# Altium PCB PCB1.PcbDoc
Units mil, origin at the board's own origin, x right, y up, seen from the top; angles counter-clockwise.
Board outline 1650 x 2726.39 mil, 2 copper layers (Top Layer, Bottom Layer); 47 components, 44 nets, 188 pads, 33 vias.
Unrouted connection lines stored in the file: 1.
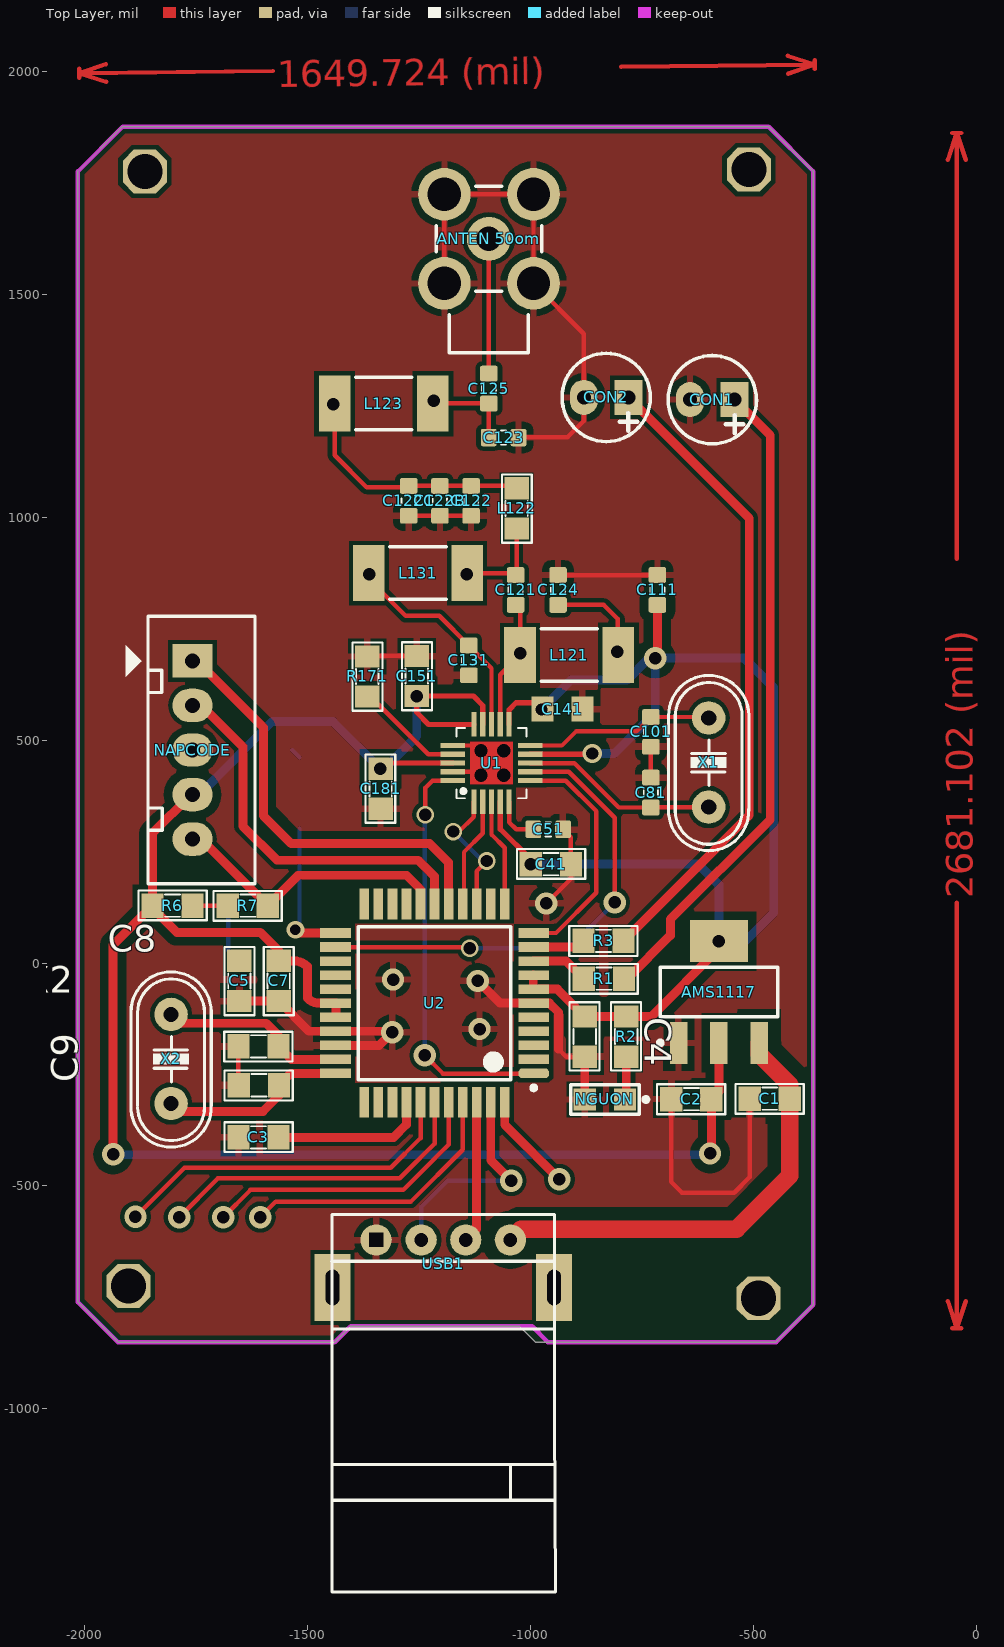
[diagram p0: Top Layer view]
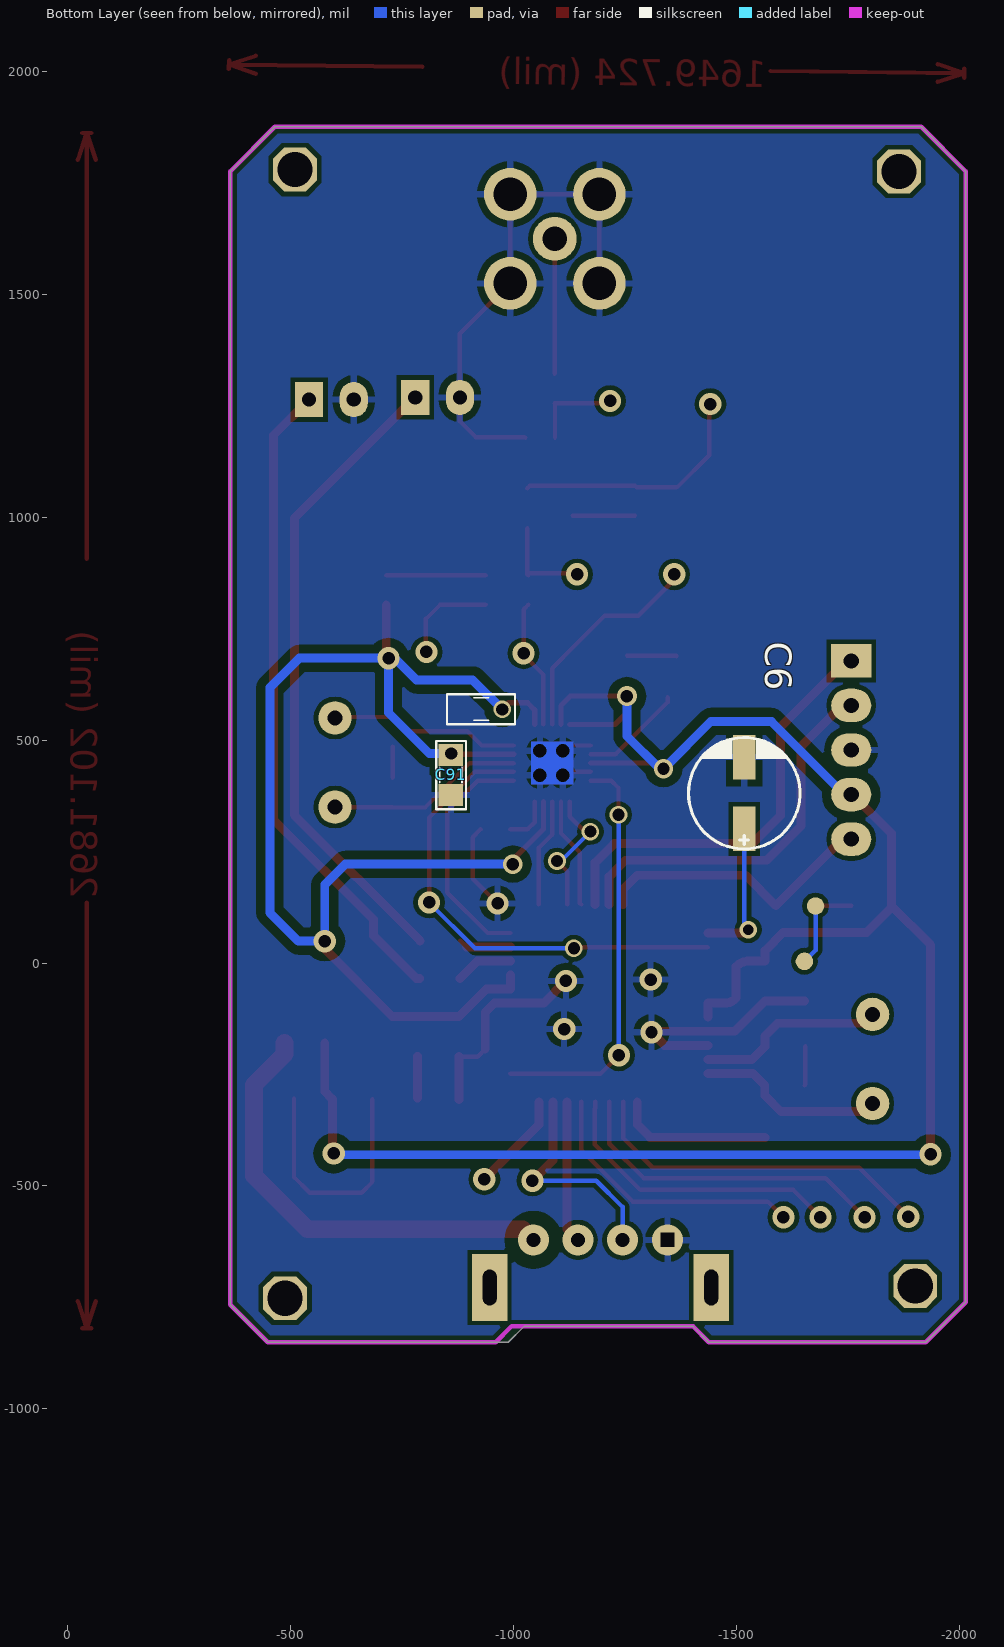
[diagram p1: Bottom Layer view, seen from below]
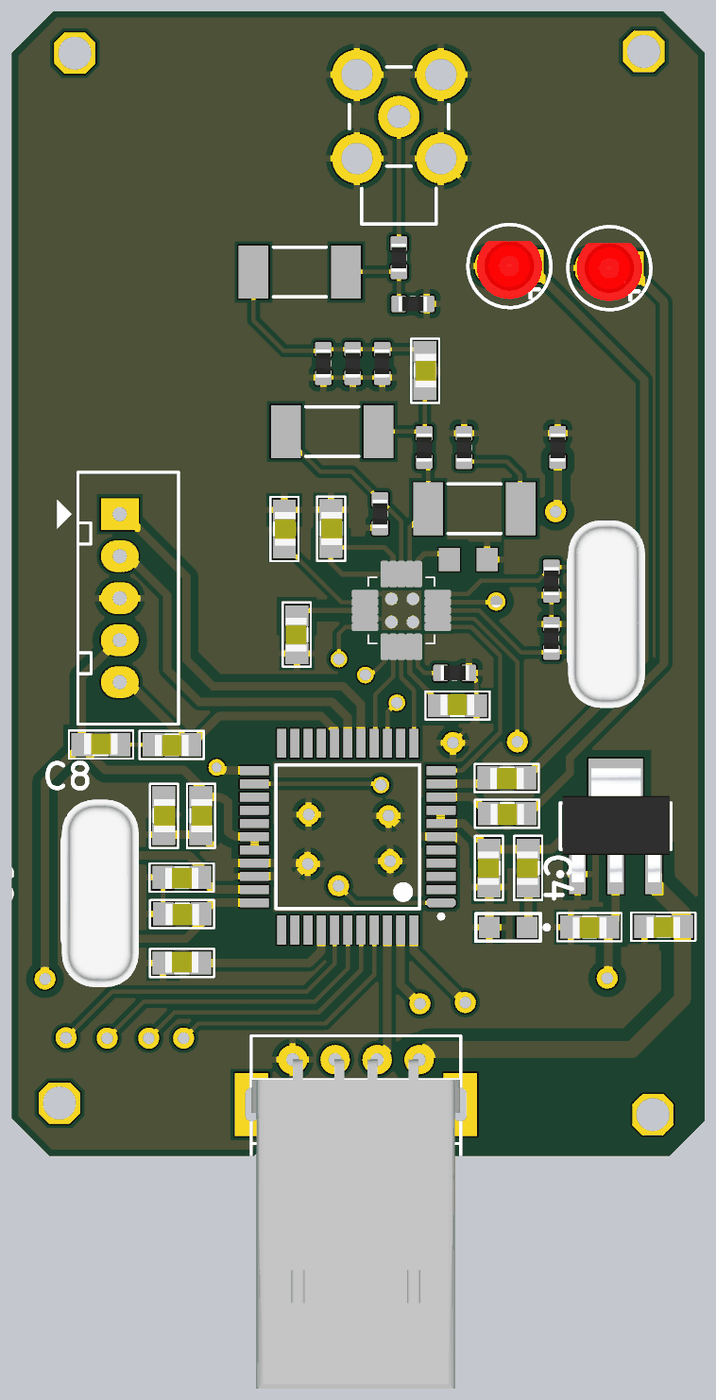
[diagram p2: 3D render of the assembled board from above, using the file's embedded part models]

## Layer stack, top to bottom
Top Solder: solder mask 0.4, Solder Resist, Dk 3.5
Top Layer: signal copper 1.4
Dielectric1: dielectric 12.6, FR-4, Dk 4.8
Bottom Layer: signal copper 1.4
Bottom Solder: solder mask 0.4, Solder Resist, Dk 3.5

## Board outline
-2015,-760.59 -2015,1776 -1915,1876 -465,1876 -365,1776 -365,-766.57 -448.82,-850.39 -988.61,-850.39 -1024.04,-814.96 -1403.17,-814.96 -1438.61,-850.39 -1925.2,-850.39

## Design rules (kind name [scope] priority, off if disabled: settings)
Clearance 3.3 [InNet('+3.3V')] p1: gap=20
Clearance 5 [InNet('+5V')] p2: gap=30
Clearance [All] p3: gap=10
PolygonConnect [All] p1: connectstyle=Relief reliefconductorwidth=15 reliefentries=4 polygonreliefangle="90 Angle" airgapwidth=15
RoutingVias [All] p1: holewidth=28 width=50 viastyle="Through Hole" minholewidth=28 minwidth=50 maxholewidth=28 maxwidth=50
SolderMaskExpansion [All] p1: expansion=4
UnpouredPolygon [All] p1: allowunpoured=FALSE
Width 5V [InNet('+5V')] p1: maxlimit=40 minlimit=40 preferedwidth=40
Width 3.3V [InNet('+3.3V')] p2: maxlimit=25 minlimit=12 preferedwidth=20
Width [All] p3: maxlimit=20 minlimit=20 preferedwidth=20
29 further rules are at their usual default settings.

## Components (designator, comment, footprint, x,y, rotation, side; value= is the part's Value field where it differs from the comment)
AMS1117 "LM317" SOT223-4N -577,-65 r90 top
"ANTEN 50om" "Header 2" MCX5.08-H5 -1093,1369 r90 top
C1 "104" SM-0805#1 -463,-304 r0 top
C2 "104" SM-0805#1 -639,-305 r0 top
C3 "103" SM-0805#1 -1610,-391 r180 top
C4 "103" SM-0805#1 -878,-165 r270 top
C5 "103" SM-0805#1 -1653,-40 r90 top
C6 "100uF/35V" CP1/2.5_SM -1518,331 r90 bottom
C7 "103" SM-0805#1 -1565,-40 r90 top
C8 "33pF" SM-0805#1 -1609,-274 r0 top
C9 "33pF" SM-0805#1 -1610,-187 r0 top
C41 "104" SM-0805#1 -954,222 r180 top
C51 "104" 0603ESDA -960,300 r180 top
C81 "27pF" 0603ESDA -729.68,382.59 r270 top
C91 "103" SM-0805#1 -860,422 r90 bottom
C101 "27pF" 0603ESDA -729.68,518.59 r90 top
C111 "220pF" 0603ESDA -715,837 r270 top
C121 "6.8pF" 0603ESDA -1033,837 r270 top
C122 "12pF" 0603ESDA -1133,1037 r270 top
C122B "12pF" 0603ESDA -1203,1037 r270 top
C122C "12pF" 0603ESDA -1273,1037 r270 top
C123 "6.8pF" 0603ESDA -1060,1179 r0 top
C124 "220pF" 0603ESDA -938,837 r270 top
C125 "220pF" 0603ESDA -1093,1289 r90 top
C131 "27" 0603ESDA -1138,679 r270 top
C141 "103" SM-0805#2 -928,570 r180 bottom
C151 "220pF" SM-0805#1 -1255,644 r90 top
C181 "27pF" SM-0805#1 -1336,391 r270 top
CON1 "LED" LED3mm -592,1264 r180 top
CON2 "LED" LED3mm -830,1269 r180 top
L121 "27nH" SM-2512 -913,691 r180 top
L122 "22nH" SM-0805#1 -1031,1020 r90 top
L123 "27nH" SM-2512 -1329,1255 r0 top
L131 "27nH" SM-2512 -1252,875 r0 top
NAPCODE "JP5" CON5 -1758,678 r270 top
NGUON "LED" LED0805 -833,-306 r180 top
R1 "220" SM-0805#1 -835,-35 r0 top
R2 "220" SM-0805#1 -785,-165 r270 top
R3 "220" SM-0805#1 -836,50 r0 top
R6 "1k" SM-0805#1 -1803,129 r180 top
R7 "1k" SM-0805#1 -1634,129 r0 top
R171 "56K" SM-0805#1 -1366,643 r90 top
U1 "CC1101" QFN-20Pin -1166,370 r90 top
U2 "PIC18F45J50-I/ML" PIC18F45J50SMD -1215,-90 r180 top
USB1 "USB-S" USB-A -1045,-621 r180 top
X1 "26Mhz" XT2 -600,450 r90 top
X2 "20Mhz" XT2 -1806,-215 r90 top

## Footprints (in the part's own frame and the unit in brackets; to place one, negate y for a bottom-side part, rotate by r counter-clockwise, add the part's x,y. Pads: shape width x height; smd on the part's side, far side on the other; paste and mask are expansions set on the pad)
0603ESDA [mm] "Chip ESD suppressor, Body 1.6x0.8mm, 0603, IPC Medium Density"
  round 0.254 on Mech15: 0(0,0)
  rrect25% 0.9x1 smd: 1(-0.85,0) 2(0.85,0)
  Top Layer pour cut-out: -0.65,0.5 -0.45,0.7 0.45,0.7 0.65,0.5 0.65,-0.5 0.45,-0.7 -0.45,-0.7 -0.65,-0.5
  silkscreen extent -0.15,-0.41 0.15,0.41, body extent -0.85,-0.45 0.85,0.45, height 0.79
CON5 [mil] "CON5"
  rect 75x90 hole 34: 1(0,0)
  oval 75x90 hole 34: 2(100,0) 3(200,0) 4(300,0) 5(400,0)
  silkscreen extent -100,-150 500,140
CP1/2.5_SM [mil] "Tu hoa SMD 33 >100 uF,50V, 220uF/16V,25V"
  rect 100x50 smd: 1(-30,0) 2(131,0)
  silkscreen extent -75,-125 175,125
LED3mm [mm]
  rect 1.6x2 hole 0.8: 1(-1.27,0)
  oval 1.6x2 hole 0.8: 2(1.27,0)
  silkscreen extent -2.52,-2.51 2.51,2.52, body extent -1.99,-1.5 1.99,1.99, height 5.38
LED0805 [mil] "Chip Resistor; Body 2.0 x 1.3 mm (LxW typ)"
  rect 50x50 smd: 1(-45,0) 2(45,0)
  silkscreen extent -97,-33 77,33, body extent -60,-25 60,25, height 47
MCX5.08-H5 [mm] "Chan anten"
  round 2.5 hole 1.4: 1(6.5,0)
  round 3 hole 1.9: 2(3.96,-2.54) 2(3.96,2.54) 2(9.04,-2.54) 2(9.04,2.54)
  silkscreen extent 0,-3 9.5,3
PIC18F45J50SMD [mm] "PIC18F45J50SMD"
  oct 1.75x0.55 smd: 1(-5.65,4)
  rect 1.75x0.55 smd: 2(-5.65,3.2) 3(-5.65,2.4) 4(-5.65,1.6) 5(-5.65,0.8) 6(-5.65,0) 7(-5.65,-0.8) 8(-5.65,-1.6) 9(-5.65,-2.4) 10(-5.65,-3.2) 11(-5.65,-4) 23(5.65,-4) 24(5.65,-3.2) 25(5.65,-2.4) 26(5.65,-1.6) 27(5.65,-0.8) 28(5.65,0) 29(5.65,0.8) 30(5.65,1.6) 31(5.65,2.4) 32(5.65,3.2) 33(5.65,4)
  rect 0.55x1.75 smd: 12(-4,-5.65) 13(-3.2,-5.65) 14(-2.4,-5.65) 15(-1.6,-5.65) 16(-0.8,-5.65) 17(0,-5.65) 18(0.8,-5.65) 19(1.6,-5.65) 20(2.4,-5.65) 21(3.2,-5.65) 22(4,-5.65) 34(4,5.65) 35(3.2,5.65) 36(2.4,5.65) 37(1.6,5.65) 38(0.8,5.65) 39(0,5.65) 40(-0.8,5.65) 41(-1.6,5.65) 42(-2.4,5.65) 43(-3.2,5.65) 44(-4,5.65)
  silkscreen extent -5.77,-4.35 4.35,4.95, body extent -5,-5 5,5, height 1.2
QFN-20Pin [mm] "QFN 20pin 4x4mm"
  rect 1.4x0.3 smd paste+0.1 mask+0.1: 1(-0.2,-1) 2(-0.2,-1.5) 3(-0.2,-2) 4(-0.2,-2.5) 5(-0.2,-3) 11(4.2,-3) 12(4.2,-2.5) 13(4.2,-2) 14(4.2,-1.5) 15(4.2,-1)
  rect 0.3x1.4 smd paste+0.1 mask+0.1: 6(1,-4.2) 7(1.5,-4.2) 8(2,-4.2) 9(2.5,-4.2) 10(3,-4.2) 16(3,0.2) 17(2.5,0.2) 18(2,0.2) 19(1.5,0.2) 20(1,0.2)
  round 0 hole 0.762: 21(1.3,-1.4) 21(1.3,-2.7) 21(2.7,-2.7) 21(2.7,-1.4)
  Top Layer region: 0.8,-0.8 3.2,-0.8 3.2,-3.2 0.8,-3.2
  Bottom Layer region: 0.8,-0.8 3.2,-0.8 3.2,-3.2 0.8,-3.2
  Top Overlay keep-out circle w0.254: c0.4,-0.4 r0.1
  silkscreen extent 0,-4 4,0
SM-0805#1 [mil] "Compoment SMD 80x50mil"
  rect 50x55 smd: 1(-45,0) 2(45,0)
  silkscreen extent -77,-34 76,33, body extent -40,-27 40,23, height 24
SM-0805#2 [mil] "Compoment SMD 80x50mil"
  rect 50x55 smd far side: 1(-45,0) 2(45,0)
  silkscreen extent -77,-34 76,33, body extent -40,-27 40,23, height 24
SM-2512 [mm] "Chip Resistor; Body 6.3 x 3.2 mm (LxW typ) - C"
  rect 1.8x3.2 smd: 1(-2.8,0) 2(2.8,0)
  silkscreen extent -1.6,-1.5 1.6,1.5
SOT223-4N [mm] "SOT223, 4-Leads, Body 6.5x3.5mm, Pitch 2.3mm, Lead Span 7mm, IPC Medium Density"
  rect 2.4x1 smd: 1(-2.9,2.3) 2(-2.9,0) 3(-2.9,-2.3)
  rect 2.4x3.3 smd: 4(2.9,0)
  silkscreen extent -3.02,-3.35 1.4,3.47, body extent -3.39,-3.27 3.5,3.23, height 1.72
USB-A [mil]
  round 70 hole 31: 1(0,0) 2(100,0) 3(200,0)
  round 70 hole 31 square: 4(301,0)
  rect 80x150 hole 31 slot 80 at 90 deg: 5(-98,107) 6(399,107)
  silkscreen extent -101,-57 401,790, body extent -97,0 399,784, height 177
XT2 [mil] "Footpin for Crystal 2 pin"
  round 75 hole 34: 1(-100,0) 2(100,0)
  silkscreen extent -198,-90 195,90, body extent -233,-93 213,90, height 138

## Part data
AMS1117: "Adj Voltage +1.2 -> +37V"
"ANTEN 50om": library part Hed2, "Header 2 (Green)"
C1 C2: library part Cap, "Capacitor"
C3 C4 C5 C7 C41 C51 C81 C91 C101 C111 C121 C122 C122B C122C C123 C124 C125 C131 C141 C151 C181: library part CM, "Cap SMD"
C6: library part CP3, "Cap 100uF/35V - 470uF/16V"
C8 C9: library part CN0, "Cremic For Xtal 1pF => 100pF"
CON1 CON2 NGUON: "LED Single colour Green and Red"
L121 L122 L123 L131: library part L1, "Inductor"
NAPCODE: library part Con5, "Connector 5"
R1 R2 R3 R6 R7: library part R, "Resistor 1/4W"
R171: library part RM, "Resistor SMD"
U1: "Transceiver 315Mhz"
U2: "Low Power, High Performance USB Microcontroller with nanoWatt XLP Technology, 44-pin QFN, Industrial Temperature"
USB1: library part USB_S, "USB connector"
X1 X2: library part XT2, "Crystal For all Crystal 2pin."

## Free pads (board coordinates)
  oct 98.43x98.43 hole 78.74: 0(-510,1780) 1(-1865,1776) 2(-488.19,-751.97) 3(-1901.57,-724.41)
  round 39.37 all layers, no hole: 2(-1678,128) 3(-1653,4)

## Via types
v1: diameter 50, hole 28, Top Layer to Bottom Layer, 23 vias
v2: diameter 39.37, hole 27.56, Top Layer to Bottom Layer, 5 vias
v3: diameter 43.31, hole 27.56, Top Layer to Bottom Layer, 3 vias
v4: diameter 45, hole 28, Top Layer to Bottom Layer, 1 vias
v5: diameter 39.37, hole 23.62, Top Layer to Bottom Layer, 1 vias

## Nets (pads, with @x,y where several pads share a name; then routed paths per layer and width w, separated by ;. In a path a pad name is that pad's centre, name@x,y a point inside that pad or via, vN(x,y) a via of type N, cw(c..) or ccw(c..) an arc to the next point about the centre after c; other vN are vias at no path point)
+3.3V: AMS1117.2 AMS1117.4 C2.2 C4.1 C7.2 C41.2 C91.2 C111.2 C141.2 C151.1 C181.1 NAPCODE.4 R2.1 R6.2 U1.4 U1.9 U1.11 U1.14 U1.15 U1.18 U2.7 U2.8 U2.28 U2.29 | length 7583.4
  Top Layer w12: v3(-1337,436) C181.1 -1323.26,448.74 U1.18 ; U1.15 -1228.27,535.35 -1255,562.09 v4(-1255,599) -1128,599 -1106.94,577.94 U1.14 ; U1.4 -1067.57,300.57 -999,232 v3(-999,222) ; U1.11 -1047.89,568.11 -1032,584 -990,584 v2(-975,569) ; U1.9 -862.57,468.43 v3(-861,470)
  Top Layer w20: v1(-1936,-429) -1936,41 R6.2 ; NAPCODE.4@-1743,378 NAPCODE.4 -1760.96,378 -1848,290.96 R6.2 ; U2.29@-1436.46,-121.5 -1436.46,-90 -1472.82,-90 cw(c-1472.82,-51.56) -1500,-78.74 -1500,-7.87 ccw(c-1531.08,-38.95) -1531.08,5 C7.2 -1565,28 -1606,69 -1792.93,69 -1848,124.07 R6.2 ; U2.8@-993.54,-27.01 -993.54,-58.5 -939.5,-58.5 C4.1 R2.1 -729,-120 -577,32 v1(-577,49.17) ; v1(-720,684) -715,689 C111.2 ; v1(-597,-427) -594,-424 C2.2 -577,-288 AMS1117.2
  Bottom Layer w20: v1(-1936,-429) -1935,-430 -600,-430 v1(-597,-427) ; NAPCODE.4 -1743,378 -1579,542 -1443,542 v3(-1337,436) -1328,436 -1255,509 v4(-1255,599) ; v3(-999,222) -623,222 -577,176 v1(-577,49.17) -517.83,49.17 -454,113 -454,618 -520,684 v1(-720,684) ; v2(-975,569) -909,635 -783,635 -734,684 v1(-720,684) ; v3(-861,470) -812,470 -720,562 v1(-720,684)
+5V: AMS1117.3 C1.2 USB1.1 | length 1012.8
  Top Layer w40: USB1.1 -1021,-597 -538,-597 -418,-477 C1.2 -418,-273 -486.45,-204.55 AMS1117.3
CSN: U1.7 U2.24 | length 1091.7
  Top Layer w10: U2.24@-1436.46,35.98 -1138.98,35.98 v2(-1136,33) ; U1.7 -914.06,429.06 -811,326 v1(-811,136)
  Bottom Layer w10: v2(-1136,33) -914,33 v1(-811,136)
D+: U2.43 USB1.3 | length 496
  Top Layer w20: U2.43@-1089.02,-311.46 -1089.02,-441.98 v1(-1043,-488)
  Bottom Layer w10: USB1.3 -1245,-547 -1186,-488 v1(-1043,-488)
D-: U2.42 USB1.2 | length 319.7
  Top Layer w20: USB1.2 -1120.51,-596.51 U2.42@-1120.51,-311.46
GDO0: U1.6 U2.11 | length 539
  Top Layer w10: U1.6 -920.37,409.37 -852,341 -852,158 -942.52,67.48 U2.11@-993.54,67.48
GDO2: U1.3 U2.12 | length 243
  Top Layer w10: U1.3 -1087.26,288.26 -1057.52,258.52 U2.12@-1057.52,131.46
GND: "ANTEN 50om.2" AMS1117.1 C1.1 C2.1 C3.2 C4.2 C5.1 C6.2 C7.1 C8.1 C9.1 C41.1 C51.1 C81.1 C91.1 C101.1 C111.1 C122.2 C122B.2 C122C.2 C123.2 C124.1 C131.2 C141.1 C151.2 C181.2 CON1.2 CON2.2 NAPCODE.3 NGUON.2 R171.2 U1.16 U1.21 U2.6 U2.30 U2.31 USB1.4 | length 3563.4
  Top Layer w10: C9.1 -1655,-273 C8.1 ; R171.2 -1365,689 C151.2 ; C122C.2 C122B.2 C122.2 ; -1193,1524.91 -1193,1724.91 -993,1724.91 -993,1524.91 -880,1411.91 CON2.2 -880,1216 -916,1180 -1025.54,1180 C123.2 ; U1.16 -1122.69,488.11 -1110.88,476.3 ; v1(-964.57,133.86) -909,189.43 C41.1 -909,282.46 C51.1 ; C124.1 C111.1 ; -937.01,-192.91 -919.92,-210 C4.2 ; C81.1 C101.1 ; C2.1 -684,-491 -660,-515 -543,-515 -508,-480 C1.1
  Top Layer w20: C5.1 C7.1 -1497.01,-152.99 -1436.46,-152.99 -1312.01,-152.99 v1(-1310,-155) -1339.49,-184.49 U2.31@-1436.46,-184.49 ; v1(-1118,-40) -1068,-90 -993.54,-90 -957.24,-90 -937.01,-110.24 -937.01,-192.91 ; NGUON.2 C4.2
  Bottom Layer w10: C6.2@-1534,478 C6.2
  other v1: -1114,-148 -1308,-37
LED1: R1.1 U2.9 | length 129.9
  Top Layer w20: U2.9@-993.54,4.49 -919.49,4.49 R1.1
LED2: R3.1 U2.10 | length 118.3
  Top Layer w10: R3.1@-895.02,35.98 R3.1
  Top Layer w20: U2.10@-993.54,35.98 R3.1@-895.02,35.98
MCLR: NAPCODE.5 R7.2 U2.18 | length 648.5
  Top Layer w20: NAPCODE.5 -1738,278 R7.2 -1521,197 -1278,197 -1246.5,165.5 U2.18@-1246.5,131.46
"NetANTEN 50om_1": "ANTEN 50om.1" C125.2 | length 302.4
  Top Layer w10: C125.2 -1093,1624.91
NetC3_1: C3.1 U2.37 | length 349.6
  Top Layer w20: C3.1 -1307,-391 -1277.99,-361.99 U2.37@-1277.99,-311.46
NetC5_2: C5.2 pad.2@-1678,128 pad.3@-1653,4 R6.1 R7.1 | length 213.4
  Top Layer w10: R6.1 R7.1
  Bottom Layer w10: pad.2@-1678,128 -1678,29 pad.3@-1653,4
NetC6_1: C6.1 U2.23 | length 323.4
  Top Layer w20: v5(-1527,75) -1519.48,67.48 U2.23@-1436.46,67.48
  Bottom Layer w10: v5(-1527,75) -1518,84 C6.1
NetC51_2: C51.2 U1.5 | length 107.2
  Top Layer w10: U1.5 -1047.89,315.89 -1032,300 C51.2
NetC81_2: C81.2 U1.8 X1.1 | length 442.4
  Top Layer w10: U1.8 -901.74,448.74 -802,349 -729.81,349 C81.2 -728.81,350 X1.1
NetC101_2: C101.2 U1.10 X1.2 | length 428
  Top Layer w10: U1.10 -929.21,488.11 -897.64,519.68 -762.05,519.68 C101.2 -602.06,552.06 X1.2
NetC121_1: C121.1 L122.1 L131.2 | length 216
  Top Layer w10: L131.2 -1037.54,875 C121.1 -1031,872.46 L122.1
  other v1: -1143,872
NetC121_2: C121.2 L121.2 U1.12 | length 290.6
  Top Layer w10: U1.12 -1067.57,646.66 L121.2 -1023.24,793.77 C121.2
  other v1: -1023,695
NetC122_1: C122.1 C122B.1 C122C.1 L122.2 L123.1 | length 557.6
  Top Layer w10: L123.1 -1439.24,1139.24 -1367,1067 -1276.46,1067 C122C.1 C122B.1 C122.1 -1036.46,1070.46 L122.2
  other v1: -1442,1254
NetC123_1: C123.1 C125.1 L123.2 | length 202.7
  Top Layer w10: L123.2 -1218.23,1255.54 C125.1 -1093.46,1255.07 C123.1
  other v1: -1217,1261
NetC124_2: C124.2 L121.1 | length 228.6
  Top Layer w10: C124.2 -835.54,803.54 -804,772 -804,692.24 L121.1
  other v1: -805,698
NetC131_1: C131.1 L131.1 U1.13 | length 497.8
  Top Layer w10: L131.1 -1362.24,861.24 -1280,779 -1204.54,779 C131.1 -1087.26,661.72 U1.13
  other v1: -1361,872
NetCON1_1: CON1.1 R1.2 | length 1472.1
  Top Layer w20: R1.2 -783,-35 -686,62 -686,98 -462,322 -462,1184 CON1.1
NetCON2_1: CON2.1 R3.2 | length 1448.1
  Top Layer w20: R3.2 -509,332 -509,998 CON2.1
NetNGUON_1: NGUON.1 R2.2 | length 97.2
  Top Layer w10: NGUON.1 NGUON.1@-785,-303
  Top Layer w20: NGUON.1@-785,-303 R2.2
NetR171_1: R171.1 U1.17 | length 231.4
  Top Layer w10: R171.1@-1346,596 -1346,585 -1229.43,468.43 U1.17
OSC1: C9.2 U2.32 X2.2 | length 443.4
  Top Layer w10: X2.2 X2.2@-1788,-115
  Top Layer w20: X2.2 -1786,-135 -1593,-135 -1565,-163 C9.2 -1536.02,-215.98 U2.32@-1436.46,-215.98
OSC2: C8.2 U2.33 X2.1 | length 425.9
  Top Layer w20: X2.1 -1788,-333 -1600,-333 -1564,-297 C8.2 -1537.48,-247.48 U2.33@-1436.46,-247.48
P1: U2.38 | length 793.7
  Top Layer w10: v1(-1886,-569) -1776,-459 -1313,-459 -1246.5,-392.5 U2.38@-1246.5,-311.46
P2: U2.39 | length 734.9
  Top Layer w10: v1(-1788,-570) -1701,-483 -1293,-483 -1215,-405 U2.39@-1215,-311.46
P3: U2.40 | length 669.3
  Top Layer w10: v1(-1689,-570) -1628,-509 -1285,-509 -1183,-407 -1183,-326 -1183.5,-325.5 U2.40@-1183.5,-311.46
P4: U2.41 | length 624.1
  Top Layer w10: v1(-1606,-570) -1571,-535 -1268,-535 -1152.01,-419.01 U2.41@-1152.01,-311.46
P5: U2.2
P6: U2.3
P7: U2.4
P8: U2.5
PGC: NAPCODE.1 U2.16 | length 972
  Top Layer w20: NAPCODE.1 -1748,678 -1599,529 -1599,331 -1536,268 -1226,268 -1183.5,225.5 U2.16@-1183.5,131.46
PGD: NAPCODE.2 U2.17 | length 868.6
  Top Layer w20: NAPCODE.2 -1738,578 -1645,485 -1645,307.41 -1568.2,230.61 -1251.61,230.61 -1215,194 U2.17@-1215,131.46
SCK: U1.1 U2.14 | length 303.2
  Top Layer w10: v2(-1173,295) -1160,295 -1126.63,328.37 U1.1 ; U2.14@-1120.51,131.46 -1120.51,206.49 v2(-1098,229)
  Bottom Layer w10: v2(-1173,295) -1107,229 v2(-1098,229)
SI: U1.20 U2.1 | length 961.9
  Top Layer w10: v1@-1240,-204 -1254,-204 -1251,-207 v1(-1237,-207) -1196.2,-247.8 U2.1@-993.54,-247.8 ; v2(-1236,333) -1236,393 -1219.63,409.37 U1.20
  Bottom Layer w10: v1(-1237,-207) v2@-1237,332
  Bottom Layer w20: v2@-1237,332 v2(-1236,333)
SO: U1.2 U2.15 | length 249.3
  Top Layer w10: U2.15@-1152.01,131.46 -1149,134.46 -1149,249 -1106.94,291.06 U1.2
TX1: U2.44 | length 224.3
  Top Layer w20: U2.44@-1057.52,-311.46 -1057.52,-362.48 v1(-935,-485)
pads on no net: C51.0 C81.0 C101.0 C111.0 C121.0 C122.0 C122B.0 C122C.0 C123.0 C124.0 C125.0 C131.0 U1.19 U2.13 U2.19 U2.20 U2.21 U2.22 U2.25 U2.26 U2.27 U2.34 U2.35 U2.36 USB1.5 USB1.6
copper on no net: | length 3429.5
  Top Layer w10: -2011.93,2006.06 -2011.69,1986.06 ; -1952.05,2016.78 -2011.81,1996.06 ; -1951.58,1976.78 -2011.81,1996.06 ; -1577.86,2001.24 -2011.81,1996.06 ; -1173.87,429.06 -1118.76,429.06 ; -796.16,2010.57 -362.2,2015.75 ; -422.44,2035.03 -362.2,2015.75 ; -421.96,1995.03 -362.2,2015.75 ; -362.32,2025.75 -362.09,2005.75 ; -63.31,-758.9 -43.31,-818.9 ; -63.31,1802.2 -43.31,1862.2 ; -53.31,-818.9 -33.31,-818.9 ; -53.31,1862.2 -33.31,1862.2 ; -43.31,135.77 -43.31,-818.9 ; -43.31,907.53 -43.31,1862.2 ; -23.31,-758.9 -43.31,-818.9 ; -23.31,1802.2 -43.31,1862.2
  Top Layer w20: -1118.76,429.06 -1110.88,421.18

## Polygon pours and split planes (outlines as drawn)
GND on Bottom Layer "Top Layer-No Net" (solid, remove dead copper, pour order 6): -365,-766.57 -368.18,-766.57 -452,-850.39 -960.63,-850.39 -963,-848.02 -996.06,-814.96 -1403.17,-814.96 -1405.57,-814.96 -1441,-850.39 -1925.2,-850.39 -2015,-760.59 -2015,1776 -2009,1782 -1915,1876 -1911,1872 -1907,1872 -461,1872 -365,1776 -365,-766.57
GND on Top Layer "Top Layer-No Net" (solid, remove dead copper, pour order 8): -448.82,-850.39 -365,-766.57 -365,1776 -465,1876 -1915,1876 -2015,1776 -2015,-760.59 -1925.2,-850.39 -1438.61,-850.39 -1404,-815.79 -996.89,-815.79 -996.06,-814.96 -960.63,-850.39 -448.82,-850.39

## Keep-outs
Keep-Out Layer:
  lines w10: -2015,-760.59 -1925.2,-850.39 -1438.61,-850.39 -1403.17,-814.96 -996.06,-814.96 -960.63,-850.39 -448.82,-850.39 -365,-766.57 -365,-674 -365,1776 -465,1876 -1515,1876 -1915,1876 -2015,1776 -2015,-674 -2015,-760.59

## Other copper
Top Layer:
  text "1649.724 (mil)" at -1567.43,1965.37 h60 r0.68
  text "2681.102 (mil)" at -7.32,145.77 h60 r90